# Altium PCB agm_evb.PcbDoc
Units mil, origin at the board's own origin, x right, y up, seen from the top; angles counter-clockwise.
Board outline 1141.73 x 1795.28 mil, 2 copper layers (Top Layer, Bottom Layer); 67 components, 64 nets, 262 pads, 282 vias.
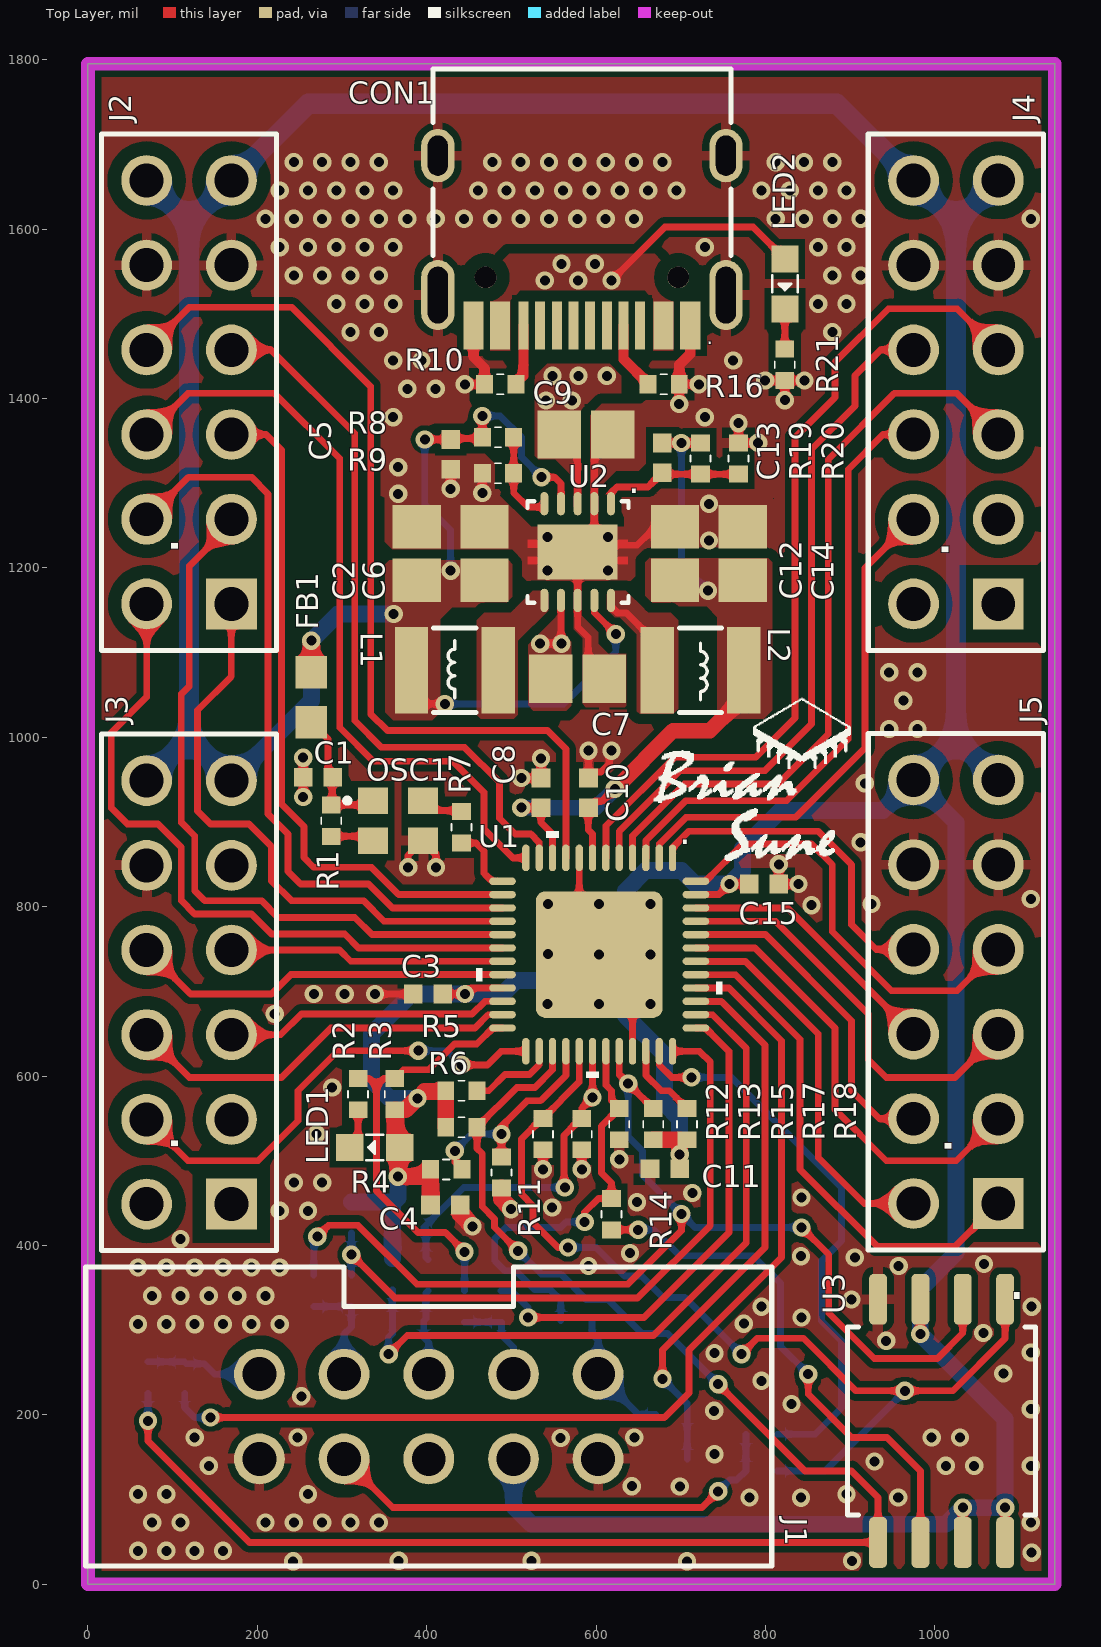
[diagram p0: Top Layer view]
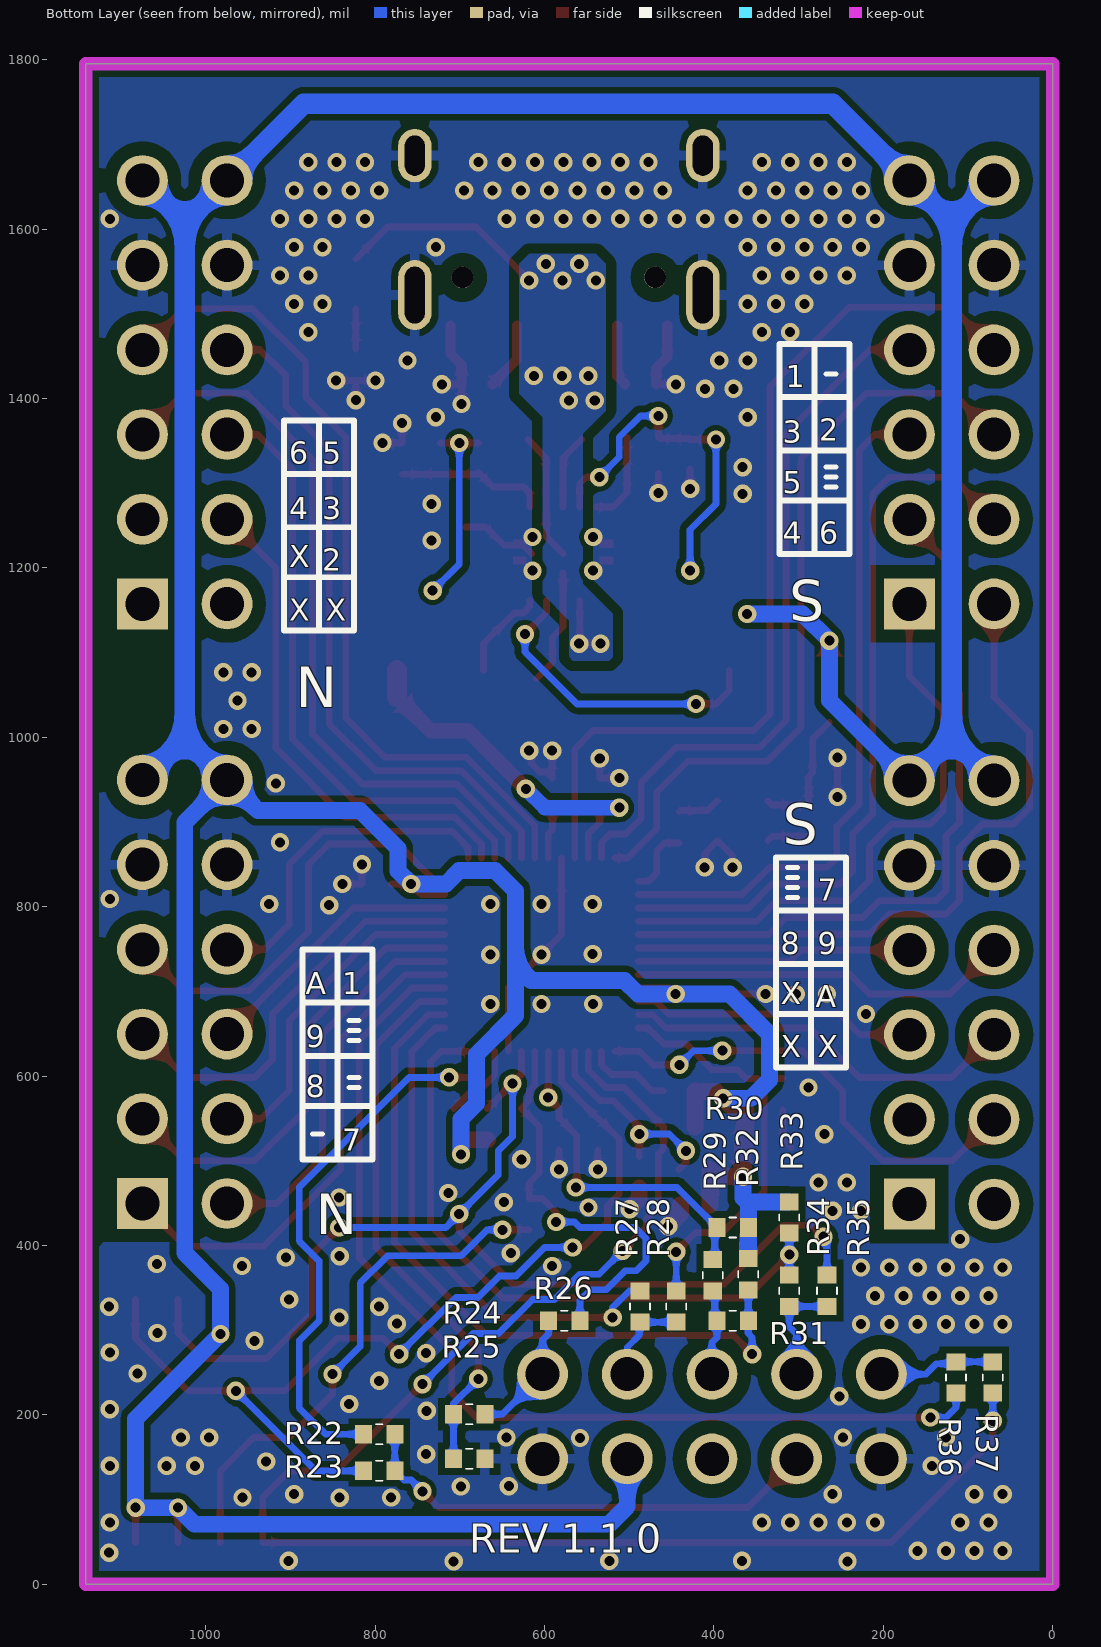
[diagram p1: Bottom Layer view, seen from below]
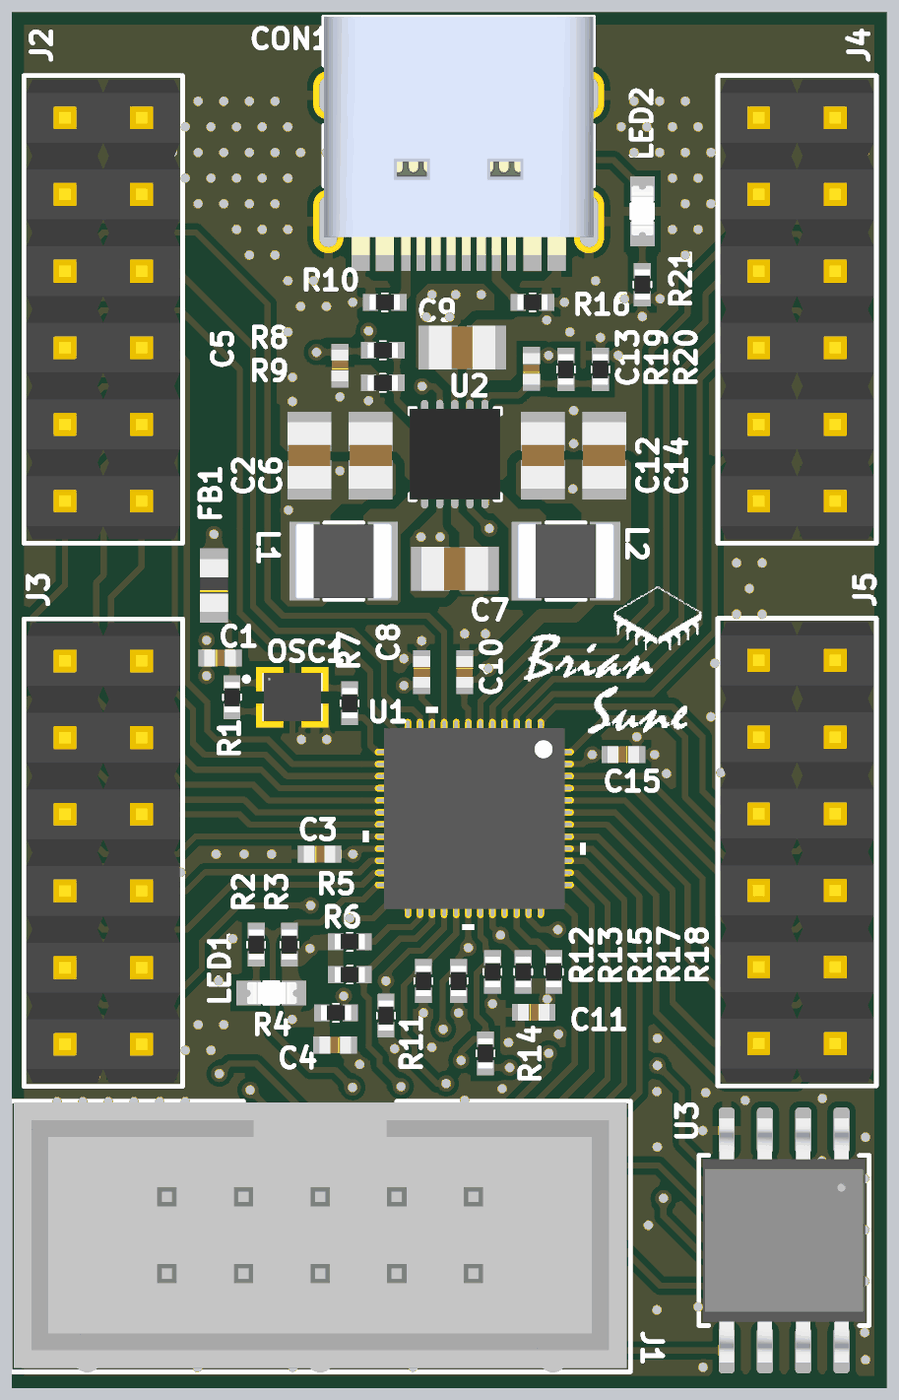
[diagram p2: 3D render of the assembled board from above, using the file's embedded part models]
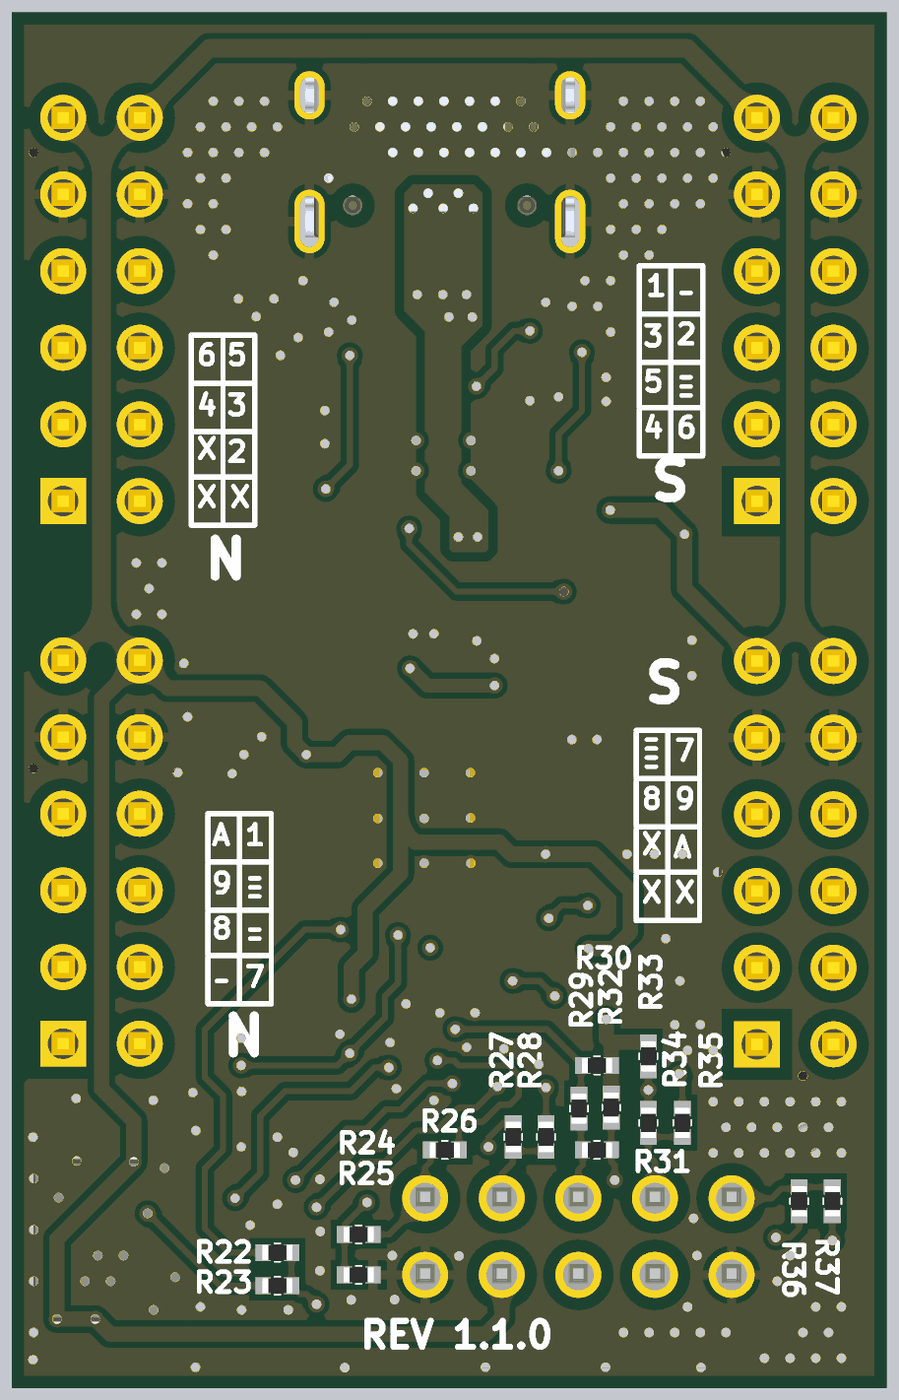
[diagram p3: 3D render of the assembled board from below, using the file's embedded part models]

## Layer stack, top to bottom
Top Solder: solder mask 0.4, Solder Resist, Dk 3.5
Top Layer: signal copper 1.4
Dielectric 1: dielectric 12.6, FR-4, Dk 4.8
Bottom Layer: signal copper 1.4
Bottom Solder: solder mask 0.4, Solder Resist, Dk 3.5

## Board outline
0,0 1141.73,0 1141.73,1795.28 0,1795.28

## Design rules (kind name [scope] priority, off if disabled: settings)
Clearance [All] p1: gap=6 ignorepadtopadclearanceinfootprint=FALSE except(0: Arc-Hole Track-Hole SMDPad-Hole THPad-Hole Via-Hole Fill-Hole Poly-Hole Region-Hole Text-Hole; 8: Arc-Poly Track-Poly SMDPad-Poly SMDPad-Region THPad-Region Fill-Poly Poly-Region; 12: Poly-Poly; 16: THPad-Poly)
ComponentClearance [All] p1: gap=20 collisioncheckmode=3 verticalgap=10 showdistances=FALSE
DiffPairsRouting [All] p1: maxlimit=10 minlimit=6 mostfreqgap=8 toplayer_minwidth=6 toplayer_maxwidth=15 toplayer_prefwidth=8 bottomlayer_minwidth=6 bottomlayer_maxwidth=15 bottomlayer_prefwidth=8 maxuncoupledlength=500
Height [All] p1: minheight=0 maxheight=1574.8 prefheight=500
HoleSize [All] p1: absolutevalues=TRUE maxlimit=236.22 minlimit=1 maxpercent=80.000 minpercent=20.000
HoleToHoleClearance [All] p1: gap=3 allowstackedmicrovias=TRUE
MinimumSolderMaskSliver [All] p1: minsoldermaskwidth=1
PolygonConnect Pour_Fill [All vs IsNamedPolygon('SW1V2L_L1', 'SW3V3L_L1', '+1V2_PO_L1', '+3V3_PO_L1', 'GND_DCDC_L1', '+5V_L1', '+5V_L1_A', '+5V_L1_B')] p1: connectstyle=Direct reliefconductorwidth=10 reliefentries=4 polygonreliefangle="90 Angle" airgapwidth=10
PolygonConnect [All] p2: thpad.connectstyle=Relief thpad.reliefconductorwidth=12 thpad.reliefentries=4 thpad.polygonreliefangle="90 Angle" thpad.airgapwidth=8 smdpad.connectstyle=Relief smdpad.reliefconductorwidth=12 smdpad.reliefentries=4 smdpad.polygonreliefangle="90 Angle" smdpad.airgapwidth=8 via.connectstyle=Direct via.reliefconductorwidth=12 via.reliefentries=4 via.polygonreliefangle="45 Angle" via.airgapwidth=8
RoutingVias [All] p1: holewidth=15.75 width=23.62 viastyle="Through Hole" minholewidth=11.81 minwidth=19.68 maxholewidth=110.24 maxwidth=118.11
SilkToSilkClearance [All] p1: silktosilkclearance=3
SilkToSolderMaskClearance [IsPad] p1: minsilkscreentomaskgap=1 clearancetoexposedcopper=TRUE
SolderMaskExpansion [All] p1: expansion=0.1
Width [All] p1: maxlimit=40 minlimit=6 preferedwidth=10
22 further rules are at their usual default settings.

## Components (designator, comment, footprint, x,y, rotation, side; value= is the part's Value field where it differs from the comment)
C1 "470nF" CAP_CC0402_YAG 271.65,952.76 r0 top (schematic designator C9)
C2 "22uF" CAPC220145_145N_KEM 388.15,1216.77 r270 top (schematic designator C4)
C3 "470nF" CAP_CC0402_YAG 401.57,696.85 r0 top (schematic designator C13)
C4 "470nF" CAP_CC0402_YAG 421.94,447.77 r180 top (schematic designator C14)
C5 "470nF" CAP_CC0402_YAG 428.15,1334.13 r90 top (schematic designator C2)
C6 "22uF" CAPC220145_145N_KEM 468.15,1216.77 r270 top (schematic designator C5)
C7 "22uF" CAPC220145_145N_KEM 578.15,1069.13 r180 top (schematic designator C8)
C8 "470nF" CAP_CC0402_YAG 534.84,934.41 r270 top (schematic designator C10)
C9 "22uF" CAPC220145_145N_KEM 587.82,1357.48 r180 top (schematic designator C1)
C10 "470nF" CAP_CC0402_YAG 590.95,934.41 r270 top (schematic designator C11)
C11 "470nF" CAP_CC0402_YAG 681.1,490.56 r0 top (schematic designator C15)
C12 "22uF" CAPC220145_145N_KEM 693.15,1216.77 r270 top (schematic designator C6)
C13 "33pF" CAP_CC0402_YAG 678.15,1330 r90 top (schematic designator C3)
C14 "22uF" CAPC220145_145N_KEM 773.15,1216.77 r270 top (schematic designator C7)
C15 "2.2uF" CAP_CC0402_YAG 798.15,826.77 r180 top (schematic designator C12)
CON1 "DX07S016JA1R1500" CONN12_016JA1R1500_JAE 583.15,1686.77 r180 top
FB1 "BLM18AG121SN1D" IND_BLM18_0603_MUR 263.78,1047.24 r90 top
J1 "JTAG" CONN10_G821_20P32X8P7_AMP 202.36,248.03 r0 top (schematic designator J5)
J2 "PMOD_S1" CON12_2X6_P100UM_HDR_TYC 169.29,1157.48 r90 top locked (schematic designator J1)
J3 "PMOD_S2" CON12_2X6_P100UM_HDR_TYC 169.29,448.82 r90 top locked (schematic designator J4)
J4 "PMOD_N2" CON12_2X6_P100UM_HDR_TYC 1074.8,1157.48 r90 top (schematic designator J2)
J5 "PMOD_N1" CON12_2X6_P100UM_HDR_TYC 1074.8,449.61 r90 top (schematic designator J3)
L1 "2.2uH" 1277AS-H-1R0M=P2 433.15,1079.13 r0 top
L2 "2.2uH" 1277AS-H-1R0M=P2 723.15,1079.13 r180 top
LED1 "SML-LX0603GW-TR" LED_SML-LX0603GW-TR_LUM 338.58,515.75 r0 top (schematic designator LED2)
LED2 "SML-LX0603GW-TR" LED_SML-LX0603GW-TR_LUM 822.83,1535.43 r90 top (schematic designator LED1)
OSC1 "SIT1602AI-73-33S-30.000000G" SON4_SIT1602-7_SIT 366.14,901.57 r0 top
R1 "10k" 0402_PAN 287.4,901.57 r270 top (schematic designator R8)
R2 "10k" 0402_PAN 318.9,578.74 r270 top (schematic designator R10)
R3 "10k" 0402_PAN 362.2,578.74 r270 top (schematic designator R11)
R4 "0R" 0402_PAN 423,489.81 r180 top (schematic designator R18)
R5 "0R" 0402_PAN 440.94,582.68 r0 top (schematic designator R36)
R6 "0R" 0402_PAN 440.94,539.75 r0 top (schematic designator R16)
R7 "22R" 0402_PAN 440.94,893.7 r90 top (schematic designator R9)
R8 "100k" 0402_PAN 484.09,1354.13 r180 top (schematic designator R4)
R9 "22k1" 0402_PAN 484.09,1311.63 r0 top (schematic designator R7)
R10 "5k1" 0402_PAN 486.69,1416.77 r0 top (schematic designator R2)
R11 "0R" 0402_PAN 488.19,486.18 r90 top (schematic designator R17)
R12 "0R" 0402_PAN 537.2,531.5 r90 top (schematic designator R14)
R13 "0R" 0402_PAN 583.04,531.5 r90 top (schematic designator R15)
R14 "22R" 0402_PAN 618.11,437.01 r270 top (schematic designator R20)
R15 "0R" 0402_PAN 627.37,543.31 r90 top (schematic designator R12)
R16 "5k1" 0402_PAN 679.61,1416.77 r180 top (schematic designator R3)
R17 "0R" 0402_PAN 667.32,543.31 r90 top (schematic designator R13)
R18 "0R" 0402_PAN 707.26,543.31 r90 top (schematic designator R37)
R19 "100k" 0402_PAN 723.15,1329.13 r90 top (schematic designator R5)
R20 "100k" 0402_PAN 768.15,1329.13 r270 top (schematic designator R6)
R21 "10k" 0402_PAN 822.83,1439.76 r90 top (schematic designator R1)
R22 "0R" 0402_PAN 795.28,177.17 r0 bottom (schematic designator R28)
R23 "0R" 0402_PAN 795.28,133.86 r0 bottom (schematic designator R35)
R24 "0R" 0402_PAN 688.98,200.79 r0 bottom (schematic designator R23)
R25 "10k" 0402_PAN 688.98,148.03 r0 bottom (schematic designator R29)
R26 "0R" 0402_PAN 576.75,311.02 r180 bottom (schematic designator R30)
R27 "0R" 0402_PAN 487.32,327.96 r90 bottom (schematic designator R24)
R28 "0R" 0402_PAN 444.59,327.96 r90 bottom (schematic designator R31)
R29 "0R" 0402_PAN 401.57,364.96 r90 bottom (schematic designator R32)
R30 "10k" 0402_PAN 377.95,421.26 r180 bottom (schematic designator R19)
R31 "0R" 0402_PAN 377.95,311.02 r180 bottom (schematic designator R25)
R32 "10k" 0402_PAN 359.45,366.14 r90 bottom (schematic designator R21)
R33 "10k" 0402_PAN 311.02,433.07 r90 bottom (schematic designator R22)
R34 "0R" 0402_PAN 311.02,346.46 r90 bottom (schematic designator R26)
R35 "0R" 0402_PAN 266.57,346.46 r90 bottom (schematic designator R33)
R36 "0R" 0402_PAN 114.17,244.09 r270 bottom (schematic designator R27)
R37 "0R" 0402_PAN 70.87,244.09 r270 bottom (schematic designator R34)
U1 "AG1280Q48" QFN48_EP 603.62,743.43 r270 top (schematic designator U2)
U2 "TPS62410DRCT" DRC0010J 578.15,1218.74 r270 top (schematic designator U1)
U3 "16Mbit" SOIC_16JLSSIG_WIN 1007.87,192.91 r270 top

## Footprints (in the part's own frame and the unit in brackets; to place one, negate y for a bottom-side part, rotate by r counter-clockwise, add the part's x,y. Pads: shape width x height; smd on the part's side, far side on the other; paste and mask are expansions set on the pad)
0402_PAN [mil]
  rect 20x22 smd paste+0 mask+0: 1(-18.5,0) 2(18.5,0)
  silkscreen extent -4,-12 4,12, body extent -20,-10 20,10, height 14
1277AS-H-1R0M=P2 [mm]
  rect 1x2.6 smd paste+0 mask+0: 1(-1.3,0) 2(1.3,0)
  silkscreen extent -0.64,-1.27 0.64,1.27, body extent -1.6,-1.25 1.6,1.25, height 1.2
CAP_CC0402_YAG [mil]
  rect 22x22 smd: 1(-17.5,0) 2(17.5,0)
  body extent -21,-11 21,11, height 22
CAPC220145_145N_KEM [mm]
  rect 1.306x1.45 smd paste+0 mask+0: 1(-0.803,0) 2(0.803,0)
  body extent -1.1,-0.72 1.1,0.72, height 1.45
CON12_2X6_P100UM_HDR_TYC [mil]
  rect 60x60 hole 40 mask+0: 1(0,0)
  round 60 hole 40 mask+0: 2(0,100) 3(100,0) 4(100,100) 5(200,0) 6(200,100) 7(300,0) 8(300,100) 9(400,0) 10(400,100) 11(500,0) 12(500,100)
  silkscreen extent -55,-54 555,154, body extent -50,-50 550,150, height 374
CONN10_G821_20P32X8P7_AMP [mil]
  round 60 hole 40 mask+0: 1(400,0) 2(400,-100) 3(300,0) 4(300,-100) 5(200,0) 6(200,-100) 7(100,0) 8(100,-100) 9(0,0) 10(0,-100)
  silkscreen extent -205,-226 605,126, body extent -200,-227 600,125, height 357
CONN12_016JA1R1500_JAE [mm]
  rect 0.3x1.45 smd: CC1(-1.25,5.095) CC2(1.75,5.095) D+(-0.25,5.095) D+(0.75,5.095) D-(-0.75,5.095) D-(0.25,5.095) SBUS1(1.25,5.095) SBUS2(-1.75,5.095)
  rect 0.6x1.45 smd: GND(-3.25,5.095) GND(3.25,5.095) VBUS(-2.45,5.095) VBUS(2.45,5.095)
  round 0.65 hole 0.65 unplated: M1(2.89,3.65) M2(-2.89,3.65)
  oval 1x2.1 hole 0.6 slot 1.7 at 90 deg mask+0: S(-4.32,4.18) S(4.32,4.18)
  oval 1x1.6 hole 0.6 slot 1.2 at 90 deg mask+0: S(-4.32,0) S(4.32,0)
  silkscreen extent -4.47,-2.6 4.47,3, body extent -4.47,-2.6 4.47,5.3, height 3.2
DRC0010J [mm]
  oval 0.7x0.24 smd: 1(-1.45,1) 2(-1.45,0.5) 3(-1.45,0) 4(-1.45,-0.5) 5(-1.45,-1) 6(1.45,-1) 7(1.45,-0.5) 8(1.45,0) 9(1.45,0.5) 10(1.45,1)
  rect 1.65x2.4 smd: 11(0,0)
  Top Layer region: 0.135,-1.1 0.135,-1.5 0.365,-1.5 0.365,-1.1
  Top Layer region: -0.135,-1.5 -0.135,-1.1 -0.365,-1.1 -0.365,-1.5
  Top Layer region: -0.135,1.1 -0.135,1.5 -0.365,1.5 -0.365,1.1
  Top Layer region: 0.135,1.5 0.135,1.1 0.365,1.1 0.365,1.5
  silkscreen extent -1.52,-1.5 1.52,1.52, body extent -1.5,-1.5 1.5,1.5, height 1
IND_BLM18_0603_MUR [mil]
  rect 38x37 smd paste+0 mask+0: 1(-29.5,0) 2(29.5,0)
  body extent -34,-19 34,19, height 37
LED_SML-LX0603GW-TR_LUM [mil]
  rect 32x32 smd paste+0 mask+0: 1(-29.5,0) 2(29.5,0)
  silkscreen extent -10,-15 10,15, body extent -32,-14 33,14, height 27
QFN48_EP [mm]
  rrect100% 0.8x0.22 smd paste-0.051 mask+0.001: 1(-2.9,2.2) 2(-2.9,1.8) 3(-2.9,1.4) 4(-2.9,1) 5(-2.9,0.6) 6(-2.9,0.2) 7(-2.9,-0.2) 8(-2.9,-0.6) 9(-2.9,-1) 10(-2.9,-1.4) 11(-2.9,-1.8) 12(-2.9,-2.2) 25(2.9,-2.2) 26(2.9,-1.8) 27(2.9,-1.4) 28(2.9,-1) 29(2.9,-0.6) 30(2.9,-0.2) 31(2.9,0.2) 32(2.9,0.6) 33(2.9,1) 34(2.9,1.4) 35(2.9,1.8) 36(2.9,2.2)
  rrect100% 0.22x0.8 smd paste-0.051 mask+0.001: 13(-2.2,-2.9) 14(-1.8,-2.9) 15(-1.4,-2.9) 16(-1,-2.9) 17(-0.6,-2.9) 18(-0.2,-2.9) 19(0.2,-2.9) 20(0.6,-2.9) 21(1,-2.9) 22(1.4,-2.9) 23(1.8,-2.9) 24(2.2,-2.9) 37(2.2,2.9) 38(1.8,2.9) 39(1.4,2.9) 40(1,2.9) 41(0.6,2.9) 42(0.2,2.9) 43(-0.2,2.9) 44(-0.6,2.9) 45(-1,2.9) 46(-1.4,2.9) 47(-1.8,2.9) 48(-2.2,2.9)
  rrect15% 3.8x3.8 smd paste-6 mask+0.025: 49(0,0)
  silkscreen extent -3.7,-3.7 3.7,3.7, body extent -3,-3 3,3, height 0.9
SOIC_16JLSSIG_WIN [mil]
  rrect50% 60x21 smd: 1(-143.5,75) 2(-143.5,25) 3(-143.5,-25) 4(-143.5,-75) 5(143.5,-75) 6(143.5,-25) 7(143.5,25) 8(143.5,75)
  silkscreen extent -111,-111 111,111, body extent -159,-106 159,106, height 85
SON4_SIT1602-7_SIT [mm]
  rect 0.9x0.8 smd paste-0.4 mask+0: 1(-0.75,-0.6) 2(0.75,-0.6) 3(0.75,0.6) 4(-0.75,0.6)
  silkscreen extent -1.6,0.52 -1.45,0.68, body extent -1,-0.8 1,0.8, height 0.8

## Part data
C1 C3 C4 C5 C8 C10 C11: library part GRM155R71A474KE01D, "GRM155R71A474KE01D / Multilayer Ceramic Capacitors MLCC - SMD/SMT PLEASE SEE MURATA'S SUGGESTED ALTERNATE GRM155R61H474ME11D", Mfr.="Murata Electronics", Mfr. No=GRM155R6YA474ME01D, ComponentLink1Description=mouser, ComponentLink1URL=https://www.mouser.hk/ProductDetail/Murata-Electronics/GRM155R6YA474ME01D?qs=sGAEpiMZZMsh%252B1woXyUXj0ipSi1CtQgVFCJAGxNeTMI%3D
C2 C6 C7 C9 C12 C14: library part C0805C106M9RACTU, "No Description Available", Mfr_Name=Kemet, Copyright="Copyright (C) 2022 Ultra Librarian. All rights reserved.", Manufacturer_Part_Number=C0805C106M9RACTU, RefDes=RefDes, Type=DEV
C13: library part GCM1555C1H330JA16J, "GCM1555C1H330JA16J", Mfr.="Murata Electronics", ComponentLink1Description=mouser, ComponentLink1URL=https://www.mouser.hk/ProductDetail/Murata-Electronics/GCM1555C1H330JA16J?qs=hNud%2FORuBR35r9xfgxU5AA%3D%3D, Mfr. No=GCM1555C1H330JA16J
C15: library part GRM155R6YA225ME11D, "GRM155R6YA225ME11D / Multilayer Ceramic Capacitors MLCC - SMD/SMT 2.2UF 35V 20% 0402", Mfr.="Murata Electronics", ComponentLink1Description=mouser, ComponentLink1URL=https://www.mouser.hk/ProductDetail/Murata-Electronics/GRM155R6YA225ME11D?qs=84nSAGdh8NX%252BZ1uZ5doDKg%3D%3D, Mfr. No=GRM155R6YA225ME11D
CON1 LED1 LED2 OSC1: "No Description Available", Copyright="Copyright (C) 2018 Accelerated Designs. All rights reserved", RefDes=RefDes, Type=DEV
  CON1: Built_By=EMA_Matt, Datasheet=https://www.digikey.com/product-detail/en/DX07S016JA1R1500/670-DX07S016JA1R1500CT-ND/11586676?utm_campaign=buynow&WT.z_cid=ref_octopart_dkc_buynow&utm_medium=aggregator&curr=usd&site=us&utm_source=octopart, Manufacturer_Part_Number=DX07S016JA1R1500, SourceLibrary=JAE_Electronics_2020-03-30, Vendor="JAE Electronics"
  LED1 LED2: Built_By=EMA_Cory, Datasheet=https://www.lumex.com/spec/SML-LX0603GW-TR.pdf, Manufacturer_Part_Number=SML-LX0603GW-TR, SourceLibrary=Lumex_2020-09-08, Vendor=Lumex
  OSC1: Built_By=EMA_Justin, Manufacturer_Part_Number=SIT1602AI-73-33S-30.000000G, SourceLibrary=SiTime_2019-03-28_19, Vendor=SiTime
FB1: "No Description Available", Mfr_Name=Murata, Copyright="Copyright (C) 2022 Ultra Librarian. All rights reserved.", Manufacturer_Part_Number=BLM18AG121SN1D, RefDes=RefDes, Type=DEV
J1: library part G821EU210AGM00Y, "G821EU210AGM00Y / Headers & Wire Housings Box Header 2.54mm*2.54mm Pitch STR DIP, 2x5Pin, G/F, NY6T, TAIL=3.0mm, Color-Black, T&R, WO/CAP", Mfr.="Amphenol ICC", ComponentLink1Description=mouser, ComponentLink1URL=https://www.mouser.hk/ProductDetail/Amphenol-Commercial-Products/G821EU210AGL00RS?qs=PzGy0jfpSMsw%252Bc01gC9TMg%3D%3D, Mfr. No=G821EU210AGM00Y
J2 J3 J4 J5: library part 10129381-912001BLF, "10129381-912001BLF / Headers & Wire Housings ECONOSTIK HEADER DR VT TH 2X6", Mfr. No=826942-6, ComponentLink1Description=mouser, ComponentLink1URL=https://www.mouser.hk/ProductDetail/Amphenol-FCI/10129381-912001BLF?qs=0lQeLiL1qybH5JyuikDxjQ%3D%3D, Mfr.=10129381-912001BLF
L1 L2: library part 1277AS-H-2R2M=P2, "1277AS-H-2R2M=P2 / SMD 2.2 UH 20%", Manufacturer_Part_Number=1277AS-H-2R2M=P2, Mfr_Name=Murata, ComponentLink1Description=mouser, ComponentLink1URL=https://www.mouser.hk/ProductDetail/Murata-Electronics/1277AS-H-2R2M%3DP2?qs=4tuKoHGzn104DGWhEjLPYA%3D%3D
R1 R2 R3 R21 R25 R30 R32 R33: library part RT0402FRE0710KL, "RT0402FRE0710KL / SMD 1/16W 10K ohm 1% 50ppm", Mfr.=YAGEO, ComponentLink1Description=mouser, ComponentLink1URL=https://www.mouser.hk/ProductDetail/YAGEO/RT0402FRE0710KL?qs=BXCcY9r%252B08Amup7nMFKW1g%3D%3D, Mfr. No=RT0402FRE0710KL
R4 R5 R6 R11 R12 R13 R15 R17 R18 R22 R23 R24 R26 R27 R28 R29 R31 R34 R35 R36 R37: library part RC0402FR-070RL, "RC0402FR-070RL / Thick Film Resistors - SMD 0 Ohms 62.5mW 0402 1%", Mfr.=YAGEO, ComponentLink1Description=mouser, ComponentLink1URL=https://www.mouser.hk/ProductDetail/YAGEO/RC0402FR-070RL?qs=sxZXDnvRBEhfSy4CZGX2ww%3D%3D, Mfr. No=RC0402FR-070RL
R7 R14: library part RT0402FRE0722RL, "RT0402FRE0722RL / SMD 1/16W 22 ohm 1% 50ppm", Mfr.=YAGEO, ComponentLink1Description=mouser, ComponentLink1URL=https://www.mouser.hk/ProductDetail/YAGEO/RT0402FRE0722RL?qs=BXCcY9r%252B08AR6tDwkCsBaQ%3D%3D, Mfr. No=RT0402FRE0722RL
R8 R19 R20: library part RT0402FRE07100KL, "RT0402FRE07100KL / SMD 1/16W 100K ohm 1% 50ppm", Mfr.=YAGEO, ComponentLink1Description=mouser, ComponentLink1URL=https://www.mouser.hk/ProductDetail/YAGEO/RT0402FRE07100KL?qs=BXCcY9r%252B08CxTvf5JB1kiw%3D%3D, Mfr. No=RT0402FRE07100KL
R9: library part RT0402FRE0722K1L, "RT0402FRE0722K1L / SMD 1/16W 22.1K ohm 1% 50ppm", Mfr.=YAGEO, ComponentLink1Description=mouser, ComponentLink1URL=https://www.mouser.hk/ProductDetail/YAGEO/RT0402FRE0722K1L?qs=gY0y7AQI9SNvNyhDoNY8tg%3D%3D, Mfr. No=RT0402FRE0722K1L
R10 R16: library part RT0402FRE075K1L, "RT0402FRE075K1L / Thin Film Resistors - SMD 5.1K OHM 1% 50PPM 1/16W", Mfr.=YAGEO, ComponentLink1Description=mouser, ComponentLink1URL=https://www.mouser.hk/ProductDetail/YAGEO/RT0402FRE075K1L?qs=gY0y7AQI9SP4FZkrbB0g%252BA%3D%3D, Mfr. No=RT0402FRE075K1L
U1: "AG1280Q48 / Replacement EPM1270", Mfr.=AGM, ComponentLink1Description=taobao, ComponentLink1URL=https://item.taobao.com/item.htm?spm=a1z10.3-c-s.w4002-24461620540.9.b1725d4eQU1zMx&id=661396416086, Mfr. No=AG1280Q48
U2: "TPS62410DRCT / 2.25MHZ 2x800mA Dual Step-Down", Mfr_Name="Texas Instruments", ComponentLink1Description=mouser, ComponentLink1URL=https://www.mouser.hk/ProductDetail/Texas-Instruments/TPS62410DRCR?qs=e2UXF4UEWQ0ltUOqd4EYmg%3D%3D, Manufacturer_Part_Number=TPS62410DRCT
U3: library part W25Q16JLSSIG, "W25Q16JLSSIG / NOR Flash spiFlash, 16M-bit, 4Kb Uniform Sector", Mfr.=Winbond, ComponentLink1Description=mouser, ComponentLink1URL=https://www.mouser.hk/ProductDetail/Winbond/W25Q16JLSSIG?qs=qSfuJ%252Bfl%2Fd6Xi57nHYg5gQ%3D%3D, Mfr. No=W25Q16JLSSIG

## Via types
v1: diameter 21.65, hole 11.81, Top Layer to Bottom Layer, tented both sides, 282 vias

## Nets (pads, with @x,y where several pads share a name; then routed paths per layer and width w, separated by ;. In a path a pad name is that pad's centre, name@x,y a point inside that pad or via, vN(x,y) a via of type N, cw(c..) or ccw(c..) an arc to the next point about the centre after c; other vN are vias at no path point)
+1V2: C8.2 C10.2 C12.2 C13.2 C14.2 L2.1 R19.2 U1.7 U1.10 | length 770.8
  Top Layer w8: v1(511.65,916.91) C8.2 534.84,899.61 548.51,885.94 U1.10 ; U1.7 595.75,885.83 590.55,891.03 590.55,916.51 C10.2 598.7,924.67 607.52,924.67 v1(622.05,939.19) ; C13.2 678.22,1347.57 v1(700.65,1347.57) 723.08,1347.57 R19.2
  Top Layer w18: v1(622.05,939.19) 690.73,1007.87 734.57,1007.87 L2.1@774.33,1047.64
  Top Layer w24: L2.1@774.33,1047.64 L2.1
  Bottom Layer w8: v1(700.65,1347.57) 700.65,1204.62 v1(732.04,1173.23)
  Bottom Layer w18: v1(511.65,916.91) 599.76,916.91 v1(622.05,939.19)
+3V3: C2.2 C3.2 C4.2 C5.2 C6.2 C11.2 C15.2 FB1.2 J1.4 J2.11 J2.12 J3.11 J3.12 J4.11 J4.12 J5.11 J5.12 L1.1 LED1.2 R3.2 R4.2 R5.1 R6.1 R8.2 R17.1 R18.1 R30.2 R32.2 R33.2 U1.21 U1.47 U2.4 U2.9 U3.3 U3.7 U3.8 | length 7325.1
  Top Layer w8: L1.1 381.97,1055.06 397.65,1039.37 v1(421.26,1039.37) ; v1(397.64,1351.63) C5.2 429.4,1352.88 464.34,1352.88 R8.2 v1(465.59,1379.44) ; C3.2 v1(445.15,696.85) 452.35,704.06 U1.21 ; v1(535.43,1307.09) 550.82,1307.09 558.46,1299.44 U2.4 U2.4@558.46,1271.89 ; U2.9 597.83,1147.09 v1(623.15,1121.77) ; U1.47 717.92,814.42 745.11,814.42 v1(757.46,826.77) C15.2 ; v1(982.68,295.47) U3.3@982.68,336.41 ; U3.7 v1(1032.87,90.35) ; U3.8 v1(1082.87,90.35)
  Top Layer w20: FB1.2 v1(263.78,1114.17) ; R3.2 363.2,560.24 363.2,520.63 366.11,517.72 366.11,481.6 v1(365.79,481.29) R4.2@404.44,481.29 ; 375.11,560.24 388.66,573.8 v1(389.11,573.8) ; 397.44,581.68 R5.1@422.44,581.68 ; C4.2 R4.2@404.44,481.29 ; R4.2 404.5,481.29 R4.2@404.44,481.29 ; R6.1 R5.1@422.44,581.68 ; R5.1 R5.1@422.44,581.68 ; R17.1 698.6,524.81 v1(698.6,507.68)
  Bottom Layer w8: v1(397.64,1351.63) 397.64,1275.59 428.15,1245.08 v1(428.15,1196.85) ; v1(421.26,1039.37) 561.62,1039.37 623.15,1100.9 v1(623.15,1121.77) ; v1(465.59,1379.44) 486.7,1379.44 511.81,1354.33 511.81,1330.71 v1(535.43,1307.09)
  Bottom Layer w20: J3.11 263.78,1043.31 v1(263.78,1114.17) 295.28,1145.67 v1(360.89,1145.67) ; R33.2 361.06,451.57 365.79,456.3 v1(365.79,481.29) ; R32.2 R30.2 359.45,449.97 ; v1(389.11,573.8) 356.16,573.8 334.65,595.31 334.65,649.71 381.78,696.85 v1(445.15,696.85) 489.68,696.85 505.43,712.6 615.86,712.6 634.5,731.23 ; J1.4 502.36,92.13 523.62,70.87 1013.39,70.87 v1(1032.87,90.35) v1(1082.87,90.35) 1082.87,195.28 v1(982.68,295.47) 982.68,348.82 1024.8,390.94 1024.8,899.61 J5.12 938.58,913.39 817.74,913.39 772.87,868.51 772.87,842.18 v1(757.46,826.77) 716.54,826.77 700.79,842.52 658.3,842.52 634.5,818.71 634.5,731.23 ; v1(698.6,507.68) 698.6,549.43 680.52,567.52 680.52,625.27 634.56,671.22 634.56,731.17 634.5,731.23
  Bottom Layer w24: J3.12@69.29,949.61 119.29,999.61 ; J2.12 119.29,1607.48 ; J3.11@169.29,949.61 119.29,999.61 ; J5.12 1024.8,999.61 ; J5.11 1024.8,999.61 ; J4.11 1024.8,1607.48 ; 119.29,999.61 119.29,1607.48 ; 119.29,1607.48 J2.11 259.84,1748.03 884.25,1748.03 J4.12 1024.8,1607.48 ; 1024.8,999.61 1024.8,1607.48
+5V: C7.2 C9.2 CON1.VBUS LED2.2 U2.3 U2.7 | length 410.6
  Top Layer w8: v1(533.94,1110.63) 558.46,1110.63 U2.7 ; C9.2@556.54,1351.63 578.15,1330.03 U2.3 U2.3@578.15,1271.89 ; v1(618.11,1539.37) 681.1,1602.36 785.41,1602.36 LED2.2
  other v1: 559.06,1110.63 540.75,1397.64 571.31,1397.64 548.39,1426.83 579.17,1426.83 612.68,1426.83 539.37,1539.37 578.74,1539.37 559.06,1559.06 598.43,1559.06
CDONE: R2.1 R3.1 R28.2 U1.24 | length 506.4
  Top Layer w8: R2.1 331.89,597.24 340.55,588.58 ; v1(444.59,392.54) 421.92,415.21 389.78,415.21 340.55,464.44 340.55,588.58 ; U1.24 478.03,656.81 459.02,637.8 432.61,637.8 402.27,607.45 372.41,607.45 R3.1 349.21,597.24 340.55,588.58
  Bottom Layer w8: R28.2 v1(444.59,392.54)
CRESET_B: R13.2 R29.2 R30.1 U1.30 | length 401.7
  Top Layer w8: v1(562.99,468.5) 562.04,469.45 562.04,530 582.04,550 R13.2 583.04,562.1 v1(595.75,574.8) U1.30
  Bottom Layer w8: R29.2 399.01,386.02 399.01,418.7 R30.1 443.7,468.5 v1(562.99,468.5)
DATAOUT: R33.1 R34.2 U1.36 | length 772.8
  Top Layer w8: v1(311.02,389.17) 362.26,337.93 648.95,337.93 734.82,423.8 734.82,616.52 722.09,629.25 U1.36
  Bottom Layer w8: R34.2 v1(311.02,389.17) R33.1
GND: C1.1 C2.1 C3.1 C4.1 C5.1 C6.1 C7.1 C8.1 C9.1 C10.1 C11.1 C12.1 C14.1 C15.1 CON1.GND CON1.S J1.2 J1.10 J2.9 J2.10 J3.9 J3.10 J4.9 J4.10 J5.9 J5.10 OSC1.2 R9.1 R10.1 R11.1 R12.1 R13.1 R15.1 R16.1 R20.1 R21.1 R25.1 U1.8 U1.33 U1.49 U2.2 U2.8 U2.11 U3.4 | length 1465.5
  Top Layer w8: v1(254.15,929.57) C1.1 v1(254.15,975.95) ; v1(338.93,696.85) C3.1 ; v1(377.95,846.46) 377.95,860.24 OSC1.2 410.91,862.72 v1(410.91,846.46) ; v1(428.15,1293.44) C5.1 ; v1(445,1416.77) R10.1 ; v1(465.59,1288.44) R9.1 ; v1(511.65,951.91) C8.1 v1(534.84,975.1) ; v1(537.2,489.81) R12.1 ; U2.11@578.15,1194.13 U2.8 578.15,1130.51 590.55,1118.11 590.55,1088.34 C7.1 ; U2.11@578.15,1216.77 597.83,1236.46 597.83,1271.89 598.06,1272.11 598.06,1329.93 C9.1@619.76,1351.63 ; U1.8 580,767.05 v1(603.62,743.43) 642.99,704.06 U1.33 ; v1(583.04,489.81) R13.1 ; v1(590.95,984.25) C10.1 597.95,958.91 605.57,958.91 615.5,968.83 615.5,981.64 v1(618.11,984.25) ; U2.11@615.55,1216.77 625.55,1226.77 648.15,1226.77 669.76,1248.38 C12.1 ; v1(698.11,1393.58) R16.1 v1(721.3,1416.77) ; v1(768.15,1370.82) R20.1 v1(791.34,1347.63) ; v1(799.65,1421.26) R21.1 ; v1(815.65,849.96) C15.1 v1(838.84,826.77) ; v1(822.83,1398.07) R21.1 ; v1(846.02,1421.26) R21.1
  Top Layer w12: CON1.GND@455.2,1486.18 455.2,1449.04 468.19,1436.04 R10.1 ; R16.1 698.11,1439.92 711.1,1452.91 CON1.GND@711.1,1486.18
  Top Layer w20: C4.1 439.44,437.14 v1(453.98,422.6) v1@453.98,423.05 ; R11.1 488.19,454.7 499.48,443.41 v1(499.48,442.97)
  other v1: 242.28,27.06 707.26,27.06 366.81,27.56 523.62,27.56 902.14,27.56 1114.17,37.34 59.06,39.37 92.53,39.37 125.99,39.37 159.45,39.37 75.79,72.84 109.26,72.84 209.65,72.84 243.12,72.84 276.58,72.84 310.05,72.84 343.51,72.84 1113.2,72.84 781.05,102.36 841.84,102.33 956.69,102.36 59.06,106.3 92.53,106.3 259.85,106.3 895.68,106.3 642.15,115.83 698.81,115.43 142.72,139.77 1012.8,139.77 1046.27,139.77 1113.2,139.77 928.7,145 739.7,153.54 125.99,173.23 247.57,173.23 558.15,172.72 645.11,173.23 996.07,173.23 1029.53,173.23 739.24,204.72 1113.2,206.7 830.71,212.82 251.97,221.84 795.28,240.16 1080.71,248.83 739.7,272.8 1113.2,273.63 942.52,287.4 1057.16,296.65 59.06,307.09 92.53,307.09 125.99,307.09 159.45,307.09 192.92,307.09 226.38,307.09 774.47,307.74 842.4,314.96 795.28,327.69 1114.17,327.69 901.57,336.22 75.79,340.55 109.26,340.55 142.72,340.55 176.19,340.55 209.65,340.55 59.06,374.02 92.53,374.02 125.99,374.02 159.45,374.02 192.92,374.02 226.38,374.02 590.95,375.78 957.16,375.71 1057.87,378.13 905.51,385.83 841.84,387.3 639.91,390.94 109.26,407.48 226.38,440.95 259.85,440.95 548.07,444.88 648.16,451.15 842.52,456.69 713.54,462.03 243.12,474.41 276.58,474.41 627.37,501.62 269.77,531.5 288.35,586.61 220.47,673.23 542.72,685.04 603.62,685.04 664.12,685.04 266.57,696.85 303.15,696.85 543.15,744.09 664.12,743.43 854.33,801.83 543.31,803.15 603.62,803.15 664.12,803.15 925.2,803.15 1113.2,809.06 912.41,875.99 917.32,945.73 945.87,1009.85 979.34,1009.85 962.6,1043.31 945.87,1076.78 979.34,1076.78 542.53,1196.85 614.17,1196.85 733.23,1232.28 542.53,1236.46 614.17,1236.46 733.23,1275.59 366.14,1287.4 366.14,1318.9 360.24,1377.96 728.35,1377.96 376.97,1411.42 410.44,1411.42 360.24,1444.89 393.71,1444.89 761.82,1444.89 310.05,1478.35 343.51,1478.35 878.94,1478.35 293.31,1511.82 326.78,1511.82 360.24,1511.82 862.21,1511.82 895.68,1511.82 243.12,1545.28 276.58,1545.28 310.05,1545.28 343.51,1545.28 878.94,1545.28 912.41,1545.28 226.38,1578.74 259.85,1578.74 293.31,1578.74 326.78,1578.74 360.24,1578.74 728.35,1578.74 862.21,1578.74 895.68,1578.74 209.65,1612.21 243.12,1612.21 276.58,1612.21 310.05,1612.21 343.51,1612.21 376.97,1612.21 410.44,1612.21 443.9,1612.21 477.37,1612.21 510.83,1612.21 544.3,1612.21 577.76,1612.21 611.23,1612.21 644.69,1612.21 812.01,1612.21 845.48,1612.21 878.94,1612.21 912.41,1612.21 1113.2,1612.21 226.38,1645.67 259.85,1645.67 293.31,1645.67 326.78,1645.67 360.24,1645.67 460.64,1645.67 494.1,1645.67 527.57,1645.67 561.03,1645.67 594.49,1645.67 627.96,1645.67 661.42,1645.67 694.89,1645.67 795.28,1645.67 828.75,1645.67 862.21,1645.67 895.68,1645.67 243.12,1679.14 276.58,1679.14 310.05,1679.14 343.51,1679.14 477.37,1679.14 510.83,1679.14 544.3,1679.14 577.76,1679.14 611.23,1679.14 644.69,1679.14 678.16,1679.14 812.01,1679.14 845.48,1679.14 878.94,1679.14
ION1: J5.8 U1.1 | length 404.2
  Top Layer w8: U1.1 690.24,869.96 709.47,889.2 861.99,889.2 901.57,849.61 901.57,778.74 930.71,749.61 J5.8
ION2: J4.4 U1.2 | length 600.1
  Top Layer w8: U1.2 674.62,857.72 674.62,874.14 705.99,905.51 835.43,905.51 917.33,987.4 917.33,1200 J4.4
ION3: J4.6 U1.3 | length 721.8
  Top Layer w8: U1.3 658.87,857.72 658.87,878.19 705.87,925.2 825.02,925.2 897.64,997.81 897.64,1316.44 938.68,1357.48 J4.6
ION4: J4.5 U1.4 | length 884.4
  Top Layer w8: U1.4 642.99,883.73 704.15,944.88 814.96,944.88 874.02,1003.94 874.02,1328.26 951.85,1406.1 1026.18,1406.1 J4.5
ION5: J4.8 U1.5 | length 825.5
  Top Layer w8: U1.5 627.37,857.72 627.37,889.2 698.81,960.63 799.21,960.63 854.33,1015.75 854.33,1340.07 905.51,1391.26 905.51,1427.19 935.8,1457.48 J4.8
ION6: J4.7 U1.6 | length 992.6
  Top Layer w8: U1.6 611.5,895.55 692.32,976.38 788.19,976.38 834.65,1022.83 834.65,1354.21 881.89,1401.46 881.89,1442.94 944.88,1505.93 1026.35,1505.93 J4.7
ION7: J5.2 U1.42 | length 460.8
  Top Layer w8: U1.42 717.92,735.42 776.39,735.42 862.2,649.61 862.2,503.94 916.54,449.61 J5.2
ION8: J5.3 U1.43 | length 537.9
  Top Layer w8: U1.43 717.92,751.17 787.4,751.17 881.89,656.68 881.89,560.63 942.52,500 1025.2,500 J5.3
ION9: J5.5 U1.45 | length 485.9
  Top Layer w8: U1.45 811.69,782.8 921.26,673.23 921.26,619.69 942.52,598.43 1023.62,598.43 J5.5
ION10: J5.7 U1.48 | length 513.3
  Top Layer w8: U1.48 729.21,830.04 773.19,874.02 854.33,874.02 878.74,849.61 878.74,770.87 948.82,700.79 1025.98,700.79 J5.7
IONGB1: J5.1 U1.41 | length 600.7
  Top Layer w8: U1.41 717.92,719.68 764.58,719.68 840.77,643.48 840.77,489.94 931.58,399.13 1024.32,399.13 J5.1
IONGB2: J5.4 U1.44 | length 395.5
  Top Layer w8: U1.44 799.88,767.05 901.57,665.35 901.57,582.68 934.65,549.61 J5.4
IONGB3: J5.6 U1.46 | length 318.7
  Top Layer w8: U1.46 825.87,798.54 J5.6
IOS1: J2.7 U1.11 | length 846.3
  Top Layer w8: J2.7 216.34,1457.48 314.96,1358.86 314.96,1019.69 346.46,988.19 444.59,988.19 485.79,946.99 485.79,904.42 504.38,885.83 522.86,885.83 532.76,875.93 U1.11
IOS2: J2.6 U1.12 | length 906.3
  Top Layer w8: J2.6 117.91,1406.1 220.31,1406.1 297.27,1329.15 297.27,1011.56 337.18,971.65 430.95,971.65 467.61,934.99 467.61,891.92 501.93,857.6 U1.12
IOS3: J2.5 U1.14 | length 811.5
  Top Layer w8: J2.5 210.15,1357.48 228.35,1339.29 228.35,921.26 254.96,894.65 254.96,858.07 266.57,846.46 334.65,846.46 366.81,814.29 U1.14
IOS4: J2.1 U1.16 | length 698.9
  Top Layer w8: J2.1 169.29,1071.96 129.29,1031.96 129.29,912.92 144.58,897.64 190.16,897.64 216.34,871.46 216.34,830.91 240.16,807.09 325.37,807.09 349.66,782.8 U1.16
IOS5: J2.3 U1.17 | length 860.1
  Top Layer w8: J2.3@177.17,1259.84 119.68,1202.36 119.68,1060.63 110.24,1051.18 110.24,899.49 125.98,883.74 125.98,818.9 137.8,807.09 204.72,807.09 224.41,787.4 314.96,787.4 335.31,767.05 U1.17
IOS6: J2.2 U1.18 | length 825.5
  Top Layer w8: J2.2 69.29,1047.64 27.56,1005.91 27.56,916.51 46.44,897.64 82.68,897.64 110.24,870.08 110.24,807.09 125.98,791.34 192.91,791.34 216.54,767.72 303.15,767.72 319.57,751.3 U1.18
IOS7: J3.8 U1.20 | length 451.2
  Top Layer w8: J3.8 121.26,696.85 216.54,696.85 239.49,719.8 U1.20
IOS8: J3.5 U1.22 | length 336.5
  Top Layer w8: J3.5 227.56,648.82 251.97,673.23 453.53,673.23 468.61,688.31 U1.22
IOS9: J3.6 U1.23 | length 471.7
  Top Layer w8: J3.6 119.68,598.43 228.35,598.43 286.73,656.81 456.91,656.81 472.53,672.43 489.32,672.43 U1.23
IOS10: J3.4 U1.25 | length 556.1
  Top Layer w8: J3.4 118.11,500 200.79,500 248.03,547.24 248.03,582.68 295.28,629.92 v1(390.03,629.92) ; v1(440.94,613.19) 471.55,613.19 487.61,629.25 U1.25
  Bottom Layer w8: v1(390.03,629.92) 424.21,629.92 v1(440.94,613.19)
IOSGB1: J2.8 U1.9 | length 1087.1
  Top Layer w8: J2.8 119.68,1507.87 240.16,1507.87 333.81,1414.22 333.81,1027.6 353.54,1007.87 542.72,1007.87 564.25,986.34 U1.9
IOSGB2: R7.1 U1.13 | length 82.6
  Top Layer w8: R7.1 458.17,875.2 467.61,865.76 467.61,839.48 477.05,830.04 U1.13
IOSGB3: J2.4 U1.15 | length 898.6
  Top Layer w8: J2.4 118.9,1307.09 192.91,1307.09 212.6,1287.4 212.6,909.45 236.22,885.83 236.22,841.73 251.18,826.77 331.22,826.77 359.45,798.54 U1.15
IOSGB4: J3.7 U1.19 | length 325.7
  Top Layer w8: J3.7 296.97,748.82 310.24,735.55 U1.19
JTAG_P1: J1.1 R24.1 R26.1 | length 153.6
  Bottom Layer w8: R26.1 595.25,295.47 602.36,288.36 J1.1 649.61,200.79 R24.1
JTAG_P3: J1.3 R27.1 R28.1 | length 110.8
  Bottom Layer w8: R28.1 R27.1 488.1,309.46 488.1,294.1 502.36,279.84 J1.3
JTAG_P5: J1.5 R29.1 R31.1 | length 103
  Bottom Layer w8: R29.1 399.01,343.9 399.01,313.58 R31.1 396.45,291.34 402.36,285.43 J1.5
JTAG_P7: J1.7 R34.1 R35.1 | length 128
  Bottom Layer w8: R35.1 R34.1 311.02,303.94 302.36,295.28 J1.7
JTAG_P8: J1.8 R22.1 R23.1 | length 559.5
  Top Layer w8: J1.8 359.84,90.55 724.96,90.55 v1(744.09,109.69)
  Bottom Layer w8: v1(744.09,109.69) 757.36,122.95 765.87,122.95 R23.1 R22.1
JTAG_P9: J1.9 R36.1 R37.1 | length 137.5
  Bottom Layer w8: R37.1 R36.1 116.3,260.46 137.17,260.46 149.61,248.03 J1.9
NCS: R22.2 U1.35 | length 659.9
  Top Layer w8: U1.35 674.49,613.32 689.38,598.43 v1(712.6,598.43)
  Bottom Layer w8: v1(712.6,598.43) 759.84,598.43 889.76,468.5 889.76,405.51 866.14,381.89 866.14,311.02 889.76,287.4 889.76,208.27 858.66,177.17 R22.2
NetC1_2: C1.2 FB1.1 OSC1.4 R1.1 | length 160.2
  Top Layer w8: FB1.1 283.46,998.06 283.46,958.44 C1.2 288.28,951.88 288.28,920.95 R1.1 331.49,920.07 OSC1.4
NetC13_1: C13.1 R19.1 R20.2 U2.1 | length 177.9
  Top Layer w8: U2.1@617.52,1271.89 U2.1 617.52,1288.44 624.59,1295.51 661.16,1295.51 C13.1 680.02,1310.63 R19.1 R20.2
NetCON1_CC1: CON1.CC1 R16.2 | length 81.3
  Top Layer w12: CON1.CC1 632.46,1486.09 632.46,1446.42 661.11,1417.77 R16.2
NetCON1_CC2: CON1.CC2 R10.2 | length 73.2
  Top Layer w12: R10.2 505.19,1417.77 514.26,1426.83 CON1.CC2
NetLED1_1: LED1.1 R2.2 | length 48.6
  Top Layer w8: LED1.1 318.9,525.56 R2.2
NetLED2_1: LED2.1 R21.2 | length 47.7
  Top Layer w8: R21.2 LED2.1
NetOSC1_1: OSC1.1 R1.2 | length 51.3
  Top Layer w8: R1.2 331.49,883.07 OSC1.1
NetOSC1_3: OSC1.3 R7.2 | length 50.7
  Top Layer w8: OSC1.3 407.42,913.45 439.7,913.45 R7.2
NetR4_1: R4.1 R11.2 U1.28 | length 254.1
  Top Layer w8: v1(433.07,511.81) 433.07,498.24 R4.1 ; R11.2 v1(488.19,531.5) 488.19,540.57 518.39,570.78 534.1,570.78 564.25,600.93 U1.28
  Bottom Layer w8: v1(433.07,511.81) 452.76,531.5 v1(488.19,531.5)
NetR5_2: R5.2 U1.26 | length 101.9
  Top Layer w8: R5.2 473.17,582.68 492.24,601.75 521.19,601.75 532.76,613.32 U1.26
NetR8_1: R8.1 R9.2 U2.5 | length 108.6
  Top Layer w8: R8.1 R9.2 502.59,1288.74 519.45,1271.89 U2.5@538.78,1271.89
NetR14_2: R14.2 U3.6 | length 624.8
  Top Layer w8: R14.2 v1(649.68,418.51) ; v1(850.39,248.03) 850.39,224.41 901.57,173.23 943.5,173.23 982.87,133.86 U3.6
  Bottom Layer w8: v1(649.68,418.51) 668.11,418.51 698.86,387.76 785.47,387.76 817.74,355.49 817.74,280.68 v1(850.39,248.03)
NetR18_2: R18.2 U1.34 | length 93
  Top Layer w8: U1.34 658.87,629.13 658.87,600.86 677.05,582.68 686.39,582.68 R18.2
SPI_CLK: R14.1 R15.2 R26.2 U1.31 | length 505.9
  Top Layer w8: v1(586.36,427.73) 586.36,439.25 602.62,455.51 R14.1 618.11,473.83 606.37,485.57 606.37,540.81 R15.2 618.11,571.07 618.11,582.68 611.5,589.29 U1.31
  Bottom Layer w8: R26.2 558.25,335.45 546.06,347.64 527.57,347.64 505.13,370.08 492.13,370.08 480.31,381.89 480.31,408.19 493.39,421.26 558.15,421.26 564.62,427.73 v1(586.36,427.73)
SPI_MISO: R17.2 R35.2 U1.32 U3.2 | length 1317
  Top Layer w8: v1(270.71,410.39) 284.12,423.8 318.7,423.8 388.17,354.33 637.66,354.33 700.79,417.46 v1(700.79,437.09) ; U1.32 627.37,629.13 627.37,601.75 v1(637.8,591.33) R17.2 ; v1(842.52,421.26) 874.61,389.17 874.61,320.3 928.34,266.57 1002.8,266.57 1032.87,296.65 U3.2
  Bottom Layer w8: R35.2 266.57,406.26 v1(270.71,410.39) ; v1(637.8,591.33) 637.8,528.46 654.77,511.49 654.77,483.1 v1(700.79,437.09) 716.61,421.26 v1(842.52,421.26)
SPI_MOSI: R6.2 R37.2 U1.27 U3.5 | length 1871.7
  Top Layer w8: v1(70.87,192.91) 70.87,169.29 190.74,49.41 U3.5 932.87,102.56 901.57,133.86 846.46,133.86 v1(744.09,236.22) ; v1(507.87,393.7) 480.06,421.52 480.06,431.3 465.65,445.71 465.65,508.33 459.44,514.53 R6.2 506.31,586.61 527.67,586.61 548.51,607.45 U1.27
  Bottom Layer w8: v1(70.87,192.91) R37.2 ; v1(507.87,393.7) 535.44,366.13 558.26,366.13 588.18,336.22 613.98,336.22 654.27,295.93 684.39,295.93 v1(744.09,236.22)
SPI_nCS: R12.2 R23.2 U1.29 U3.1 | length 1153.8
  Top Layer w8: v1(566.79,397.64) 554.92,397.64 525.59,426.97 525.59,446.85 511.81,460.63 511.81,525.61 536.2,550 R12.2 580,592.8 U1.29 ; v1(771.65,271.65) 790.56,290.56 844.54,290.56 906.76,228.35 v1(964.57,228.35) 1021.06,228.35 1082.87,290.16 U3.1
  Bottom Layer w8: v1(566.79,397.64) 600.01,397.64 633.64,364.01 653.42,364.01 678.85,338.58 704.72,338.58 v1(771.65,271.65) ; R23.2 870.08,133.86 v1(964.57,228.35)
SW1V2L: L2.2 U2.10 | length 111.2
  Top Layer w8: U2.10 617.52,1154.57 625.31,1146.77 635.83,1146.77 671.97,1110.63 L2.2
SW3V3L: L1.2 U2.6
TCK: R24.2 R25.2 U1.39 | length 653.7
  Top Layer w8: v1(678.26,242.52) 678.26,276.69 799.21,397.64 799.21,636.73 747.76,688.18 717.92,688.18 U1.39
  Bottom Layer w8: v1(678.26,242.52) 707.48,213.31 R24.2 R25.2
TDI: R36.2 U1.40 | length 1217.3
  Top Layer w8: v1(144.58,196.85) 680.5,196.85 709.47,225.82 709.47,276.4 818.9,385.83 818.9,641.73 756.7,703.93 717.92,703.93 U1.40
  Bottom Layer w8: R36.2 114.17,208.66 125.98,196.85 v1(144.58,196.85)
TDO: R27.2 U1.37 | length 595.4
  Top Layer w8: v1(519.68,314.96) 656.54,314.96 756.77,415.2 756.77,629.25 729.21,656.81 U1.37
  Bottom Layer w8: R27.2 500,346.46 519.68,326.77 v1(519.68,314.96)
TMS: R31.2 R32.1 U1.38 | length 860.2
  Top Layer w8: v1(354.92,271.65) 376.98,293.71 667.73,293.71 777.34,403.32 777.34,632.57 737.47,672.43 717.92,672.43 U1.38
  Bottom Layer w8: v1(354.92,271.65) 354.92,291.34 359.45,295.87 R31.2 R32.1
pads on no net: CON1.D+ CON1.D- CON1.M1 CON1.M2 CON1.SBUS1 CON1.SBUS2 J1.6 J3.1 J3.2 J3.3 J4.1 J4.2 J4.3

## Polygon pours and split planes (outlines as drawn)
GND on Top Layer "GND_L01_P022" (solid, remove dead copper, pour order 22): 0,0 0,1795.28 1141.73,1795.28 1141.73,0
GND on Top Layer "GND_DCDC_L1" (solid, remove dead copper, pour order 8): 634.2,1248.38 606.58,1248.38 602.36,1252.59 602.36,1293.64 623.68,1314.96 650.38,1314.96 658.62,1323.2 658.62,1394.02 606.62,1394.02 593,1380.4 593,1252.12 588.9,1248.38 523.28,1248.38 480.32,1291.34 480.31,1322.83 468.5,1334.65 358.27,1334.65 350.39,1326.77 350.39,1231.14 359.45,1222.09 500.91,1222.09 507.87,1215.12 507.87,1192.91 515.75,1185.04 569.31,1185.04 573.31,1181.1 573.31,1127.48 583.89,1116.9 583.89,1039.37 587.82,1035.43 633.86,1035.43 635.83,1037.4 635.83,1098.43 614.17,1098.43 602.36,1110.24 602.36,1124.33 582.68,1144.02 582.68,1181.1 586.61,1185.04 644.21,1185.04 649.61,1190.43 649.61,1211.46 658.62,1220.47 811.02,1220.47 814.96,1224.41 814.96,1275.59 803.15,1287.4 652.05,1287.4 641.73,1277.08 641.73,1255.91
+5V on Top Layer "+5V_L1_B" (solid, remove dead copper, pour order 14): 582.68,1380.24 600.08,1397.64 621.46,1397.64 629.92,1406.1 629.92,1426.83 615.81,1440.94 542.53,1440.94 527.56,1425.97 527.56,1332.2 531.5,1328.26 551.66,1328.26 573.31,1306.61 573.31,1271.89 582.68,1271.89
+5V on Top Layer "+5V_L1_A" (solid, remove dead copper, pour order 12): 553.63,1169.29 553.63,1149.25 519.68,1115.31 519.68,1037.75 525.94,1031.5 564.96,1031.5 570.87,1037.4 570.87,1118.11 562.99,1125.98 562.99,1169.29
SW3V3L on Top Layer "SW3V3L_L1" (solid, remove dead copper, pour order 4): 543.15,1173.23 543.15,1149.45 507.68,1113.98 507.68,1026.77 502.68,1021.77 463.9,1021.77 458.9,1026.77 458.9,1138.31 467.68,1147.09 499.21,1147.09 525.35,1173.23
SW1V2L on Top Layer "SW1V2L_L1" (solid, remove dead copper, pour order 0): 612.68,1173.23 612.68,1151.29 622.19,1141.77 628.15,1141.77 648.15,1121.77 648.15,1030.67 651.22,1027.6 691.07,1027.6 696.93,1033.46 696.93,1138.31 688.15,1147.09 661.23,1147.09 635.09,1173.23
+5V on Top Layer "+5V_L1" (solid, remove dead copper, pour order 10): 474.41,1456.69 474.41,1548.11 497.17,1570.87 669.13,1570.87 691.93,1548.07 691.93,1456.69 667.32,1456.69 667.32,1517.72 657.48,1527.56 510.3,1527.56 498.48,1515.75 498.48,1456.69
+3V3 on Top Layer "+3V3_PO_L1" (solid, remove dead copper, pour order 6): 496.06,1209.35 355.59,1209.04 350.91,1204.35 350.91,1029.35 360.91,1019.35 405.91,1019.35 415.91,1029.35 415.91,1139.35 430.1,1153.54 495.1,1153.54 500.91,1159.35 500.91,1204.51
+1V2 on Top Layer "+1V2_PO_L1" (solid, remove dead copper, pour order 2): 662.99,1211.77 803.46,1211.46 808.15,1206.77 808.15,1031.77 798.15,1021.77 753.15,1021.77 743.15,1031.77 743.15,1141.77 730.35,1154.57 665.35,1154.57 658.15,1161.77 658.15,1206.93
GND on Bottom Layer "GND_L02_P026" (solid, remove dead copper, pour order 26): 0,0 0,1795.28 1141.73,1795.28 1141.73,0
+5V on Bottom Layer "+5V_L02_P016" (solid, remove dead copper, pour order 16): 539.37,1570.87 527.56,1559.06 527.56,1385.83 555.12,1358.27 555.12,1181.13 519.68,1145.7 519.68,1094.49 523.62,1090.55 566.93,1090.55 570.87,1094.49 570.87,1137.8 602.36,1169.29 602.36,1377.95 629.92,1405.51 629.92,1559.06 618.11,1570.87

## Keep-outs
Keep-Out Layer:
  the board outline again, w16

## Other copper
Top Layer:
  pour cut-out: 508.38,841.44 701.03,841.44 701.03,647.79 508.38,648.79

## Silkscreen, mask and mechanical layers (free items; w line width, h text height)
Top Overlay:
  drawing of 11 lines, arcs and shapes, not listed
Bottom Overlay:
  lines w5.91: 255.91,1295.28 267.72,1295.28 ; 255.91,1307.09 267.72,1307.09 ; 255.91,1318.9 267.72,1318.9 ; 255.91,1429.13 267.72,1429.13 ; 301.18,811.02 312.99,811.02 ; 301.18,822.83 312.99,822.83 ; 301.18,834.65 312.99,834.65 ; 301.18,846.46 312.99,846.46 ; 818.9,586.61 830.71,586.61 ; 818.9,598.43 830.71,598.43 ; 818.9,641.73 830.71,641.73 ; 818.9,653.54 830.71,653.54 ; 818.9,665.35 830.71,665.35 ; 862.2,531.5 874.02,531.5
  lines w7: 240.16,1279.53 322.83,1279.53 ; 240.16,1338.58 322.83,1338.58 ; 240.16,1401.57 322.83,1401.57 ; 244.09,673.23 326.77,673.23 ; 244.09,732.28 326.77,732.28 ; 244.09,795.28 326.77,795.28 ; 281.5,1216.54 281.5,1464.57 ; 285.43,610.24 285.43,858.27 ; 803.15,564.61 885.83,564.61 ; 803.15,623.67 885.83,623.67 ; 803.15,686.66 885.83,686.66 ; 824.81,1188.98 907.48,1188.98 ; 824.81,1248.03 907.48,1248.03 ; 824.81,1311.02 907.48,1311.02 ; 844.49,501.62 844.49,749.65 ; 866.14,1125.98 866.14,1374.02 ; 240.16,1216.54 240.16,1464.57 322.83,1464.57 322.83,1216.54 240.16,1216.54 ; 244.09,610.24 244.09,858.27 326.77,858.27 326.77,610.24 244.09,610.24 ; 803.15,501.62 885.83,501.62 885.83,749.65 803.15,749.65 803.15,501.62 ; 824.81,1125.98 907.48,1125.98 907.48,1374.02 824.81,1374.02 824.81,1125.98
  text "1" at 314.96,1413.39 h26
  text "2" at 275.59,1350.39 h26
  text "3" at 318.9,1347.63 h26
  text "5" at 862.2,1322.83 h26
  text "6" at 901.57,1322.83 h26
  text "5" at 318.9,1288.44 h26
  text "3" at 862.2,1257.48 h26
  text "4" at 901.57,1257.48 h26
  text "6" at 275.59,1228.35 h26
  text "4" at 318.9,1228.35 h26
  text "X" at 901.57,1200.79 h26
  text "2" at 862.2,1196.85 h26
  text "S" at 311.02,1137.8 h48
  text "X" at 858.27,1137.8 h26
  text "X" at 901.57,1137.8 h26
  text "N" at 893.7,1035.43 h48
  text "S" at 318.9,874.02 h48
  text "7" at 277.56,807.09 h26
  text "9" at 277.56,744.09 h26
  text "8" at 320.86,744.09 h26
  text "1" at 838.58,696.85 h26
  text "A" at 881.89,696.85 h26
  text "X" at 320.86,685.04 h26
  text "A" at 279.53,681.1 h26
  text "9" at 881.89,633.86 h26
  text "X" at 277.56,622.05 h26
  text "X" at 320.86,622.05 h26
  text "8" at 881.89,574.8 h26
  text "7" at 838.58,511.81 h26
  text "N" at 870.08,413.39 h48
  text "REV 1.1.0" at 688.98,37.34 h34